# Altium PCB CONN-SMD_2P-P0.60_XKB_X0600WRS-02-LPV01HF.pcbdoc
Units mm, origin at the board's own origin, x right, y up, seen from the top; angles counter-clockwise.
Board outline 15.95 x 15.11 mm, 2 copper layers (Top Layer, Bottom Layer); 1 components, 0 nets, 4 pads, 0 vias.
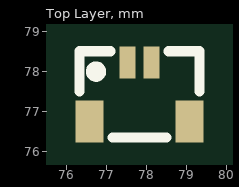
[diagram p0: Top Layer view]
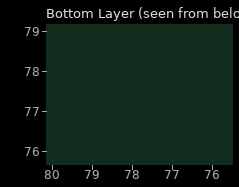
[diagram p1: Bottom Layer view, seen from below]

## Layer stack, top to bottom
Top Layer: signal copper (thickness not stored)
Dielectric: dielectric 0.32, FR-4, Dk 4.8
Bottom Layer: signal copper (thickness not stored)

## Board outline
85.804,69.85 69.85,69.85 69.85,84.964 85.804,84.964

## Components (designator, comment, footprint, x,y, rotation, side; value= is the part's Value field where it differs from the comment)
? "CONN-SMD_2P-P0.60_XKB_X0600WRS-02-LPV01HF" CONN-SMD_2P-P0.60_XKB_X0600WRS-02-LPV01HF 77.827,77.477 r0 top

## Footprints (in the part's own frame and the unit in brackets; to place one, negate y for a bottom-side part, rotate by r counter-clockwise, add the part's x,y. Pads: shape width x height; smd on the part's side, far side on the other; paste and mask are expansions set on the pad)
CONN-SMD_2P-P0.60_XKB_X0600WRS-02-LPV01HF [mm]
  rect 0.4x0.8 smd: 1(-0.3,0.737) 2(0.3,0.737)
  rect 0.7x1.05 smd: 3(1.25,-0.737) 4(-1.25,-0.737)
  silkscreen extent -1.5,-1.14 1.5,1.02

## Nets (pads, with @x,y where several pads share a name; then routed paths per layer and width w, separated by ;. In a path a pad name is that pad's centre, name@x,y a point inside that pad or via, vN(x,y) a via of type N, cw(c..) or ccw(c..) an arc to the next point about the centre after c; other vN are vias at no path point)
pads on no net: ?.1 ?.2 ?.3 ?.4